# Altium PCB Mother_2.PcbDoc
Units mil, origin at the board's own origin, x right, y up, seen from the top; angles counter-clockwise.
Board outline 2752.23 x 2490.03 mil, 2 copper layers (Top Layer, Bottom Layer); 88 components, 82 nets, 343 pads, 18 vias.
Unrouted connection lines stored in the file: 67.
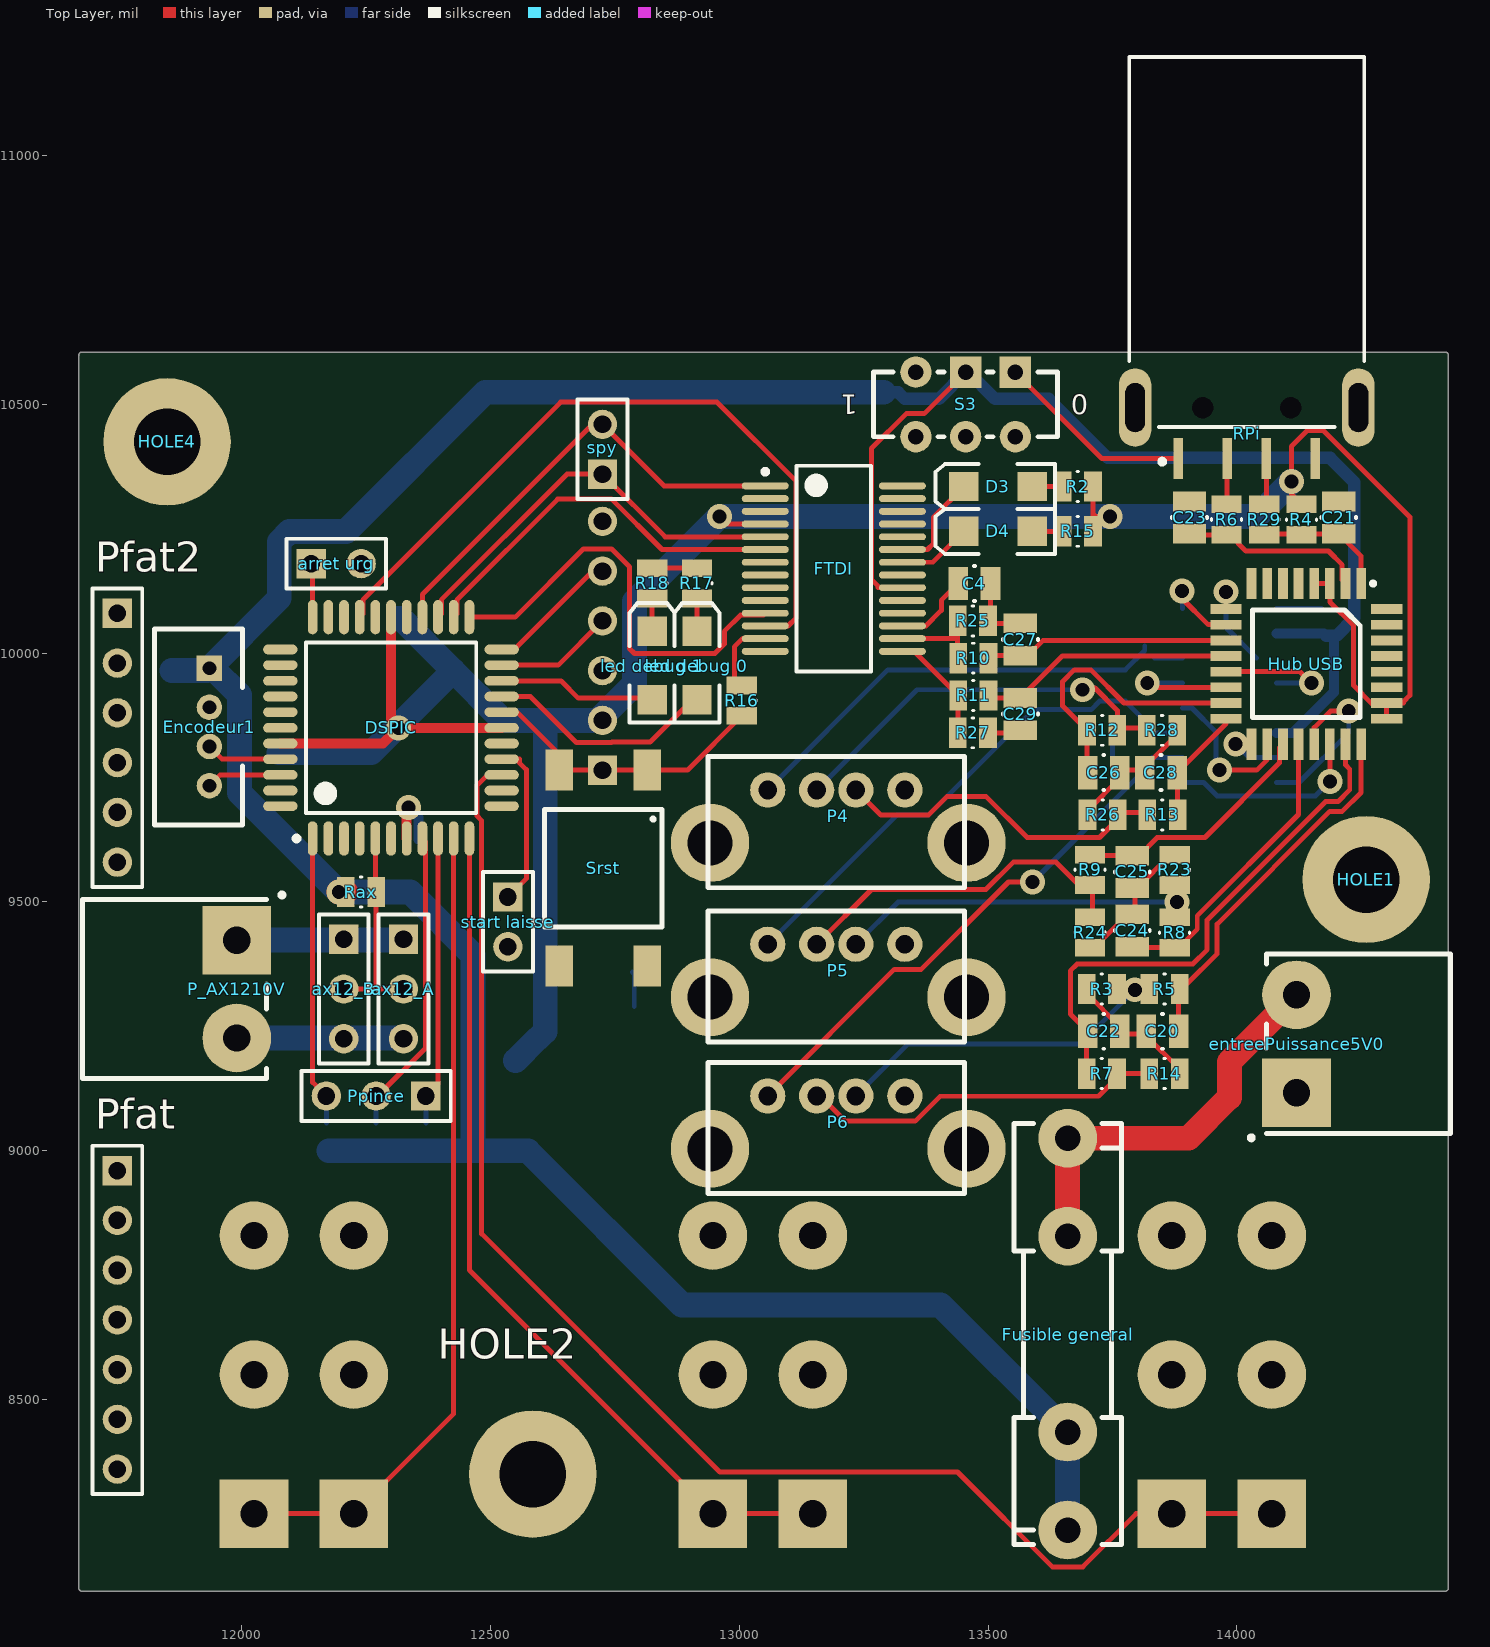
[diagram p0: Top Layer view]
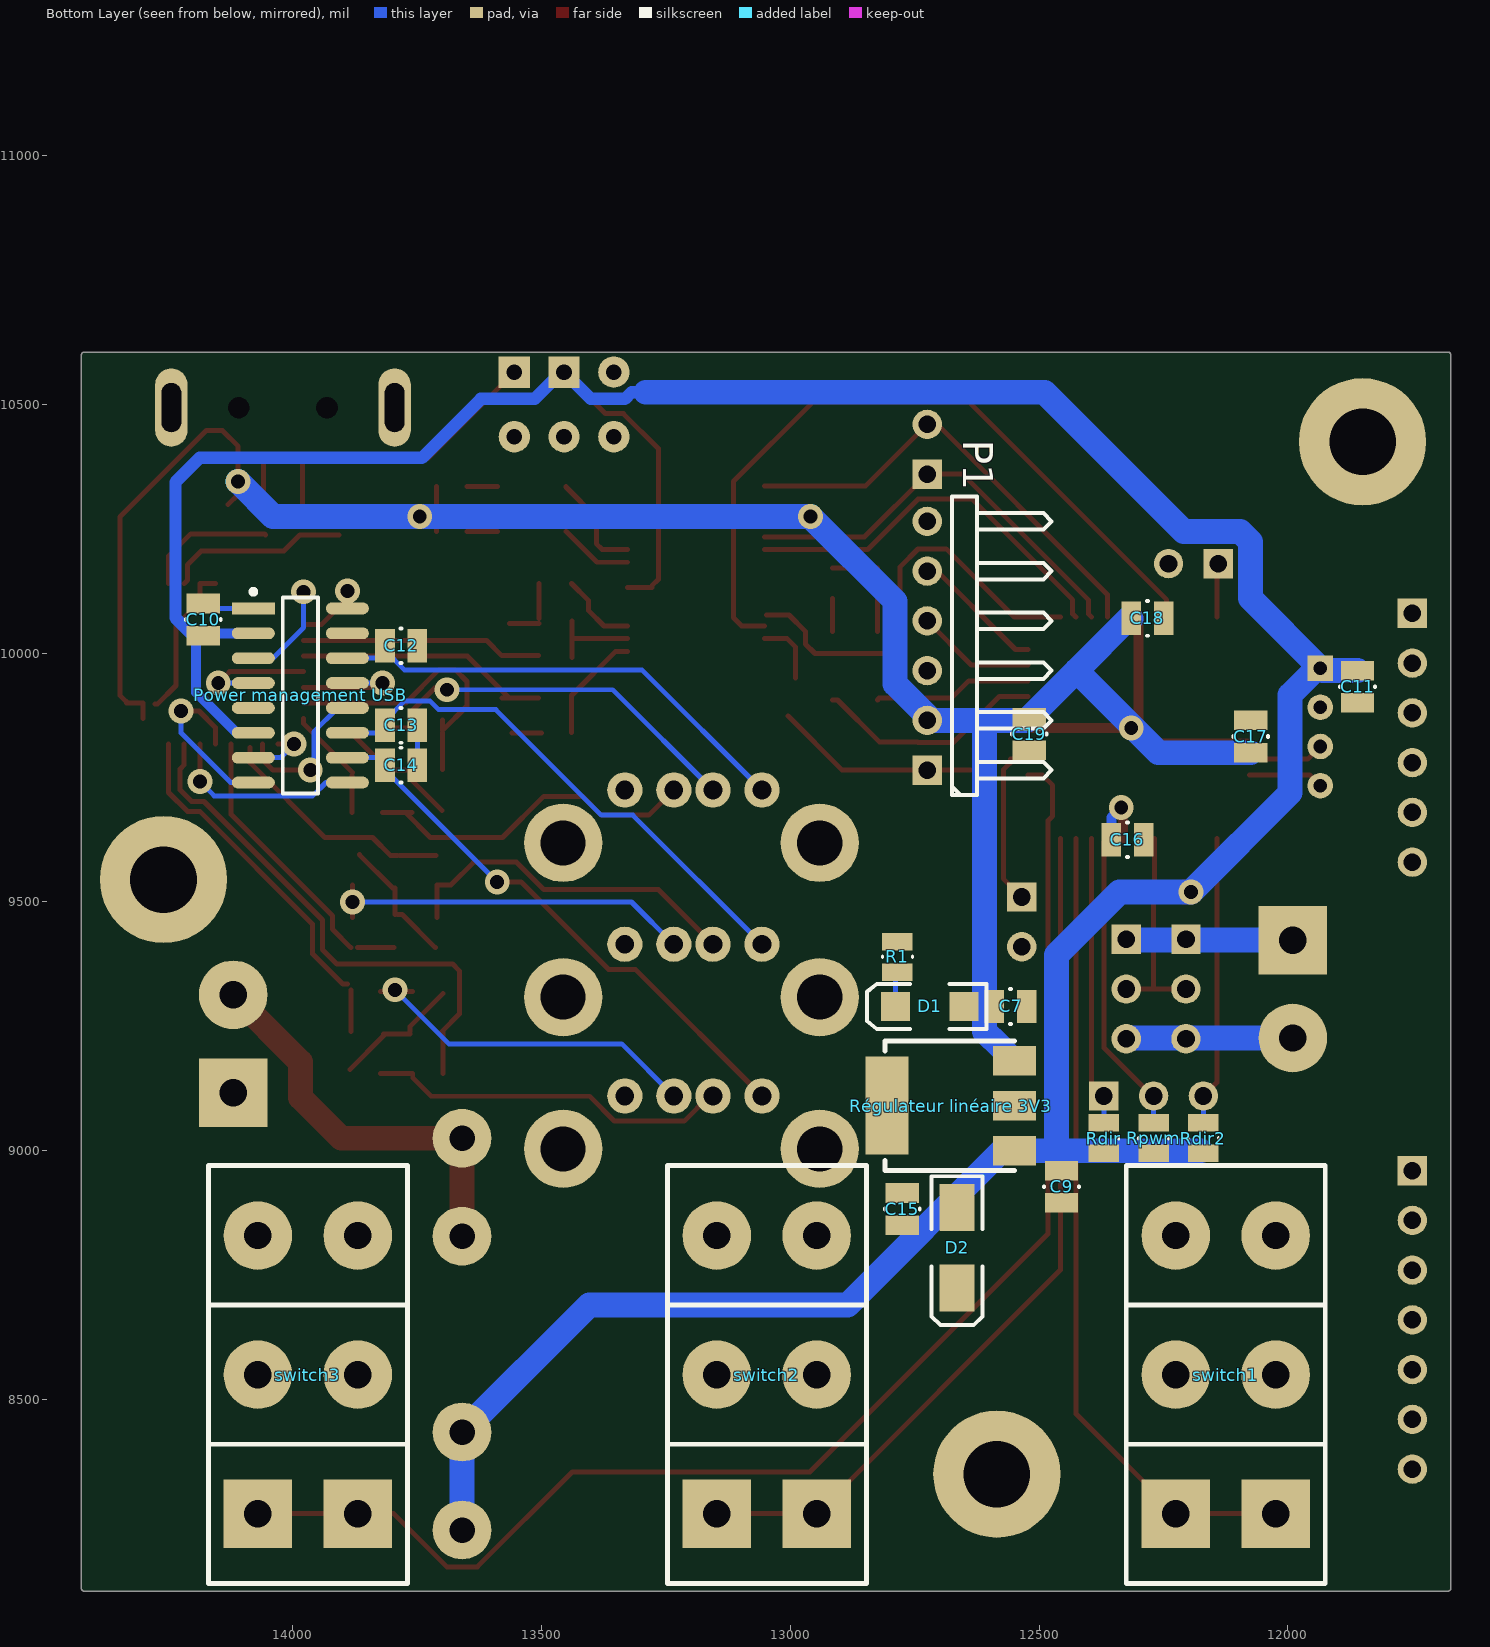
[diagram p1: Bottom Layer view, seen from below]

## Layer stack, top to bottom
Top Layer: signal copper 1.4
Dielectric: dielectric 12.6, FR-4, Dk 4.8
Bottom Layer: signal copper 1.4

## Board outline
11672.78,8120 11672.78,10597.8 cw(c11677.8,10597.8) 11672.9,10598.9 cw(c11677.8,10600) 11677.8,10605.01 14420,10605.01 cw(c14420,10600) 14425.01,10600 14425.01,8120 cw(c14420,8120) 14420,8114.98 11677.8,8114.98 cw(c11677.8,8120)

## Design rules (kind name [scope] priority, off if disabled: settings)
Clearance [All] p1: gap=10
Height [All] p1: minheight=0 maxheight=10000 prefheight=500
HoleSize [All] p1: absolutevalues=TRUE maxlimit=240 minlimit=1 maxpercent=80.000 minpercent=20.000
MinimumSolderMaskSliver [All] p1: minsoldermaskwidth=1
PolygonConnect [All] p1: connectstyle=Relief reliefconductorwidth=10 reliefentries=4 polygonreliefangle="90 Angle"
RoutingVias [All] p1: holewidth=28 width=50 viastyle="Through Hole" minholewidth=28 minwidth=50 maxholewidth=28 maxwidth=50
SilkToSilkClearance [All] p1: silktosilkclearance=1
SilkscreenOverComponentPads [All] p1: minsilkscreentomaskgap=1
SolderMaskExpansion [All] p1: expansion=4
Width [All] p1: maxlimit=100 minlimit=10 preferedwidth=10
23 further rules are at their usual default settings.

## Classes and differential pairs
component class mother1: C7 C9 C10 C12 C13 C14 C15 C20 C21 C22 C23 C24 C25 C26 C27 C28 C29 D1 D2 entreePuissance5V0 "Fusible general" HOLE1 HOLE2 HOLE4 "Hub USB" P4 P5 P6 "Power management USB" R1 R3 R4 R5 R6 R7 R8 R9 R10 R11 R12 R13 R14 R23 R24 R25 R26 R27 R28 R29 RPi "Régulateur linéaire 3V3" S3
component class U_mother1-pic: "arret urg" ax12_A ax12_B C4 C11 C16 C17 C18 C19 D3 D4 DSPIC Encodeur1 FTDI "led debug 0" "led debug 1" P1 P_AX1210V Pfat Pfat2 Ppince R2 R15 R16 R17 R18 Rax Rdir Rdir2 Rpwm spy Srst "start laisse" switch1 switch2 switch3

## Components (designator, comment, footprint, x,y, rotation, side; value= is the part's Value field where it differs from the comment)
"arret urg" "Header 2" HDR1X2 12140,10180 r0 top
ax12_A "Header 3" HDR1X3 12325,9425 r270 top
ax12_B "Header 3" HDR1X3 12205,9425 r270 top
C4 "CAP" C0805C 13440,10140 r0 top
C7 "CAP" C0805C 12525,9290 r0 bottom
C9 "CAP" C0805C 12455,8960 r270 bottom
C10 "CAP" C0805C 14180,10035 r90 bottom
C11 "CAP" C0805C 11860,9900 r90 bottom
C12 "CAP" C0805C 13750,10015 r0 bottom
C13 "CAP" C0805C 13750,9855 r0 bottom
C14 "CAP" C0805C 13750,9775 r0 bottom
C15 "CAP" C0805C 12775,8915 r270 bottom
C16 "CAP" C0805C 12290,9625 r0 bottom
C17 "CAP" C0805C 12075,9865 r270 bottom
C18 "CAP" C0805C 12250,10070 r0 bottom
C19 "CAP" C0805C 12520,9805 r90 bottom
C20 "CAP" C0805C 13883.03,9240 r180 top
C21 "CAP" C0805C 14205,10240 r90 top
C22 "CAP" C0805C 13700.04,9240 r0 top
C23 "CAP" C0805C 13905,10240 r90 top
C24 "CAP" C0805C 13790,9475 r270 top
C25 "CAP" C0805C 13790,9528.07 r90 top
C26 "CAP" C0805C 13765,9760 r180 top
C27 "CAP" C0805C 13565,9995 r90 top
C28 "CAP" C0805C 13815,9760 r0 top
C29 "CAP" C0805C 13565,9845 r90 top
D1 "LED2" LED1206G 12720,9290 r0 bottom
D2 "ZENER/5.6V" DSO-C2/X1.8 12665,8805 r270 bottom
D3 "LED" LED1206Y 13520,10335 r180 top
D4 "LED" LED1206Y 13520,10245 r180 top
DSPIC "DSPIC33FJ64MC804-I/PT" TQFP-PT44_N 12300,9850 r90 top
Encodeur1 "JST" B4B-PH-K-S 11935,9970 r270 top
entreePuissance5V0 "Bornier" "Bornier male coude 2 voies" 14120,9215 r90 top
FTDI "FT232RL" SSOP-28_M 13190,10170 r0 top
"Fusible general" "Fuse" "Fuse Holder 5x20mm" 13660,9025 r270 top
HOLE1 "Hole" SCREW 14260,9545 r0 top
HOLE2 "Hole" SCREW 12585,8350 r0 top
HOLE4 "Hole" SCREW 11850,10425 r0 top
"Hub USB" "TUSB2046BVF" TUSB2046BVF 14250,10140 r270 top
"led debug 0" "LED" LED1206R 12915,9975 r90 top
"led debug 1" "LED" LED1206R 12825,9975 r90 top
P1 "PICkit" HDR1X6H 12725,9765 r90 bottom
P4 "USB" "USB SM female vertical" 13195,9725 r0 top
P5 "USB" "USB SM female vertical" 13195,9415 r0 top
P6 "USB" "USB SM female vertical" 13195,9110 r0 top
P_AX1210V "Header 2" "Bornier male coude 2 voies" 11990,9325 r270 top
Pfat "Header 7" HDR1X7 11750,8960 r270 top
Pfat2 "Header 6" HDR1X6 11750,10080 r270 top
"Power management USB" "TPS2044" TPS2044 13985,9915 r180 bottom
Ppince "ControlleurPince" HDR1X3 12370,9110 r180 top
R1 "RES" C0805R 12785,9420 r270 bottom
R2 "RES" C0805R 13650,10335 r0 top
R3 "RES" C0805R 13698.07,9325 r0 top
R4 "RES" C0805R 14130,10238.03 r90 top
R5 "RES" C0805R 13885,9325 r180 top
R6 "RES" C0805R 13979.32,10299.06 r270 top
R7 "RES" C0805R 13698.07,9155 r0 top
R8 "RES" C0805R 13875,9408.07 r90 top
R9 "RES" C0805R 13705,9595 r270 top
R10 "RES" C0805R 13440,9990 r0 top
R11 "RES" C0805R 13440,9915 r0 top
R12 "RES" C0805R 13760,9845 r180 top
R13 "RES" C0805R 13820,9675 r0 top
R14 "RES" C0805R 13885,9155 r180 top
R15 "RES" C0805R 13650,10245 r0 top
R16 "RES" C0805R 13005,9935 r270 top
R17 "RES" C0805R 12915,10110 r90 top
R18 "RES" C0805R 12825,10110 r90 top
R23 "RES" C0805R 13875,9533.98 r90 top
R24 "RES" C0805R 13705,9469.09 r270 top
R25 "RES" C0805R 13500,10065 r180 top
R26 "RES" C0805R 13700,9675 r0 top
R27 "RES" C0805R 13500,9840 r180 top
R28 "RES" C0805R 13880,9845 r180 top
R29 "RES" C0805R 14055,10299.06 r270 top
Rax "RES" C0805R 12270,9520 r180 top
Rdir "RES" C0805R 12370,8995 r90 bottom
Rdir2 "RES" C0805R 12170,8995 r90 bottom
RPi "USB" "USB SM2.5 Male" 14020,10600 r90 top
Rpwm "RES" C0805R 12270,8995 r90 bottom
"Régulateur linéaire 3V3" "LM2937IMP-3.3" SOT223 12550,9000 r90 bottom
S3 "SW-DPDT/Reset" MCLSS22 13455,10565 r180 top
spy "Header 2" HDR1X2 12725,10360 r90 top
Srst "SPST-NO" SPST-NO 12815,9765 r180 top
"start laisse" "Header 2" HDR1X2 12535,9510 r270 top
switch1 "Switch slide 2 pos" "Switch sur cosses 5.08mm" 12125,8550 r180 bottom
switch2 "Switch slide 2 pos" "Switch sur cosses 5.08mm" 13047.5,8550 r180 bottom
switch3 "Switch slide 2 pos" "Switch sur cosses 5.08mm" 13970,8550 r180 bottom

## Footprints (in the part's own frame and the unit in brackets; to place one, negate y for a bottom-side part, rotate by r counter-clockwise, add the part's x,y. Pads: shape width x height; smd on the part's side, far side on the other; paste and mask are expansions set on the pad)
B4B-PH-K-S [mm] "JST Header 4 pins Straight"
  rect 1.3x1.3 hole 0.7: 1(0,0)
  round 1.3 hole 0.7: 2(2,0) 3(4,0) 4(6,0)
  silkscreen extent -2,-2.8 8,1.7, body extent -1.95,-2.8 7.95,1.7, height 6
"Bornier male coude 2 voies" [mm] "Bornier male coude 2 voies 12A. Pas 5mm (model : CTB9350/2A) -- 3D FAUSSE"
  rect 3.5x3.5 hole 1.4: 1(-2.5,0)
  round 3.5 hole 1.4: 2(2.5,0)
  silkscreen extent -4.9,-7.87 4.57,2.41, body extent -4.2,-7.93 4.2,1.27, height 7.25
C0805C [mm]
  rect 1x1.7 smd: 1(0,0) 2(1.65,0)
  silkscreen extent 0.8,-0.89 0.85,0.89, body extent -0.21,-0.61 1.79,0.64, height 0.78
C0805R [mm]
  rect 0.9x1.55 smd: 1(0,0) 2(1.55,0)
  silkscreen extent 0.73,-0.76 0.81,0.76, body extent -0.24,-0.62 1.76,0.63, height 0.78
DSO-C2/X1.8 [mm] "Diode; DO-214-AC/SMA; 2 C-Bend Leads; Body 5 x 2.7 mm, inc. leads (LxW)"
  rect 2.4x1.8 smd: A(2.05,0) K(-2.05,0)
  silkscreen extent -3.65,-1.3 3.95,1.3, body extent -2.74,-1.4 2.74,1.4, height 2.28
"Fuse Holder 5x20mm" [mm] "Schurter Fuse Holder 0751.0110"
  round 3 hole 1.3: 1(0,0) 1(5,0) 2(15,0) 2(20,0)
  silkscreen extent -0.75,-2.75 20.75,2.75, body extent -0.51,-3.1 20.58,3.1, height 9.86
HDR1X2 [mm] "Connector; Header; 2 Position"
  rect 1.5x1.5 hole 0.9: 1(0,0)
  round 1.5 hole 0.9: 2(2.54,0)
  silkscreen extent -1.27,-1.27 3.81,1.27
HDR1X3 [mm] "Connector; Header; 3 Position"
  rect 1.5x1.5 hole 0.9: 1(0,0)
  round 1.5 hole 0.9: 2(2.54,0) 3(5.08,0)
  silkscreen extent -1.27,-1.27 6.35,1.27
HDR1X6 [mm] "Connector; Header; 6 Position"
  rect 1.5x1.5 hole 0.9: 1(0,0)
  round 1.5 hole 0.9: 2(2.54,0) 3(5.08,0) 4(7.62,0) 5(10.16,0) 6(12.7,0)
  silkscreen extent -1.27,-1.27 13.97,1.27, body extent -1.17,-1.25 14.07,1.25, height 8.2
HDR1X6H [mm] "Connector; Header; 6 Position; Right Angle"
  rect 1.5x1.5 hole 0.9: 1(0,0)
  round 1.5 hole 0.9: 2(2.54,0) 3(5.08,0) 4(7.62,0) 5(10.16,0) 6(12.7,0)
  silkscreen extent -1.27,-6.35 13.97,-1.27, body extent -1.17,-5.85 13.87,1.25, height 5.42
HDR1X7 [mm] "Connector; Header; 7 Position"
  rect 1.5x1.5 hole 0.9: 1(0,0)
  round 1.5 hole 0.9: 2(2.54,0) 3(5.08,0) 4(7.62,0) 5(10.16,0) 6(12.7,0) 7(15.24,0)
  silkscreen extent -1.27,-1.27 16.51,1.27, body extent -1.17,-1.25 16.61,1.25, height 8.2
LED1206G [mm] "SMT LED; 2 Flat Leads; 3.2X1.6X1.1"
  rect 1.5x1.5 smd: 1(-1.75,0) 2(1.75,0)
  silkscreen extent -2.9,-1.15 3.2,1.15, body extent -1.6,-0.8 1.6,0.8, height 1.11
LED1206R [mm] "SMT LED; 2 Flat Leads; 3.2X1.6X1.1"
  rect 1.5x1.5 smd: 1(-1.75,0) 2(1.75,0)
  silkscreen extent -2.9,-1.15 3.2,1.15, body extent -1.6,-0.8 1.6,0.8, height 1.11
LED1206Y [mm] "SMT LED; 2 Flat Leads; 3.2X1.6X1.1"
  rect 1.5x1.5 smd: 1(-1.75,0) 2(1.75,0)
  silkscreen extent -2.9,-1.15 3.2,1.15, body extent -1.6,-0.8 1.6,0.8, height 1.11
MCLSS22 [mm] "Slide Switch DPDT"
  rect 1.6x1.6 hole 0.8: 1(0,0) 2(-2.54,0)
  round 1.6 hole 0.8: 3(2.54,0) 4(0,3.3) 5(-2.54,3.3) 6(2.54,3.3)
  silkscreen extent -4.7,0 4.7,3.3, body extent -4.7,-2 4.7,3.3, height 3.5
SCREW [mm] "Mounting Hole M3"
  round 6.5 hole 3.4: 1(0,0)
  body extent -2.89,-2.52 2.89,2.52, height 10
SOT223 [mm]
  rect 1.5x2.2 smd: 1(0,0) 2(2.3,0) 3(4.6,0)
  rect 5x2.2 smd: ""(2.3,6.5)
  silkscreen extent -1,0 5.6,6.6, body extent -0.95,-0.2 5.55,6.8, height 1.64
SPST-NO [mm] "Tactile Switch SPST-NO 6x6mm"
  rect 1.4x2.1 smd: 1(0,0) 2(4.5,0) 3(4.5,10) 4(0,10)
  silkscreen extent -0.75,2 5.25,8, body extent -0.75,0.93 5.25,9.08, height 5
SSOP-28_M [mm] "SOP, 28-Leads, Body 10.2x5.3mm, Pitch 0.65mm, IPC Low Density"
  oval 2.4x0.35 smd: 1(-3.5,4.225) 2(-3.5,3.575) 3(-3.5,2.925) 4(-3.5,2.275) 5(-3.5,1.625) 6(-3.5,0.975) 7(-3.5,0.325) 8(-3.5,-0.325) 9(-3.5,-0.975) 10(-3.5,-1.625) 11(-3.5,-2.275) 12(-3.5,-2.925) 13(-3.5,-3.575) 14(-3.5,-4.225) 15(3.5,-4.225) 16(3.5,-3.575) 17(3.5,-2.925) 18(3.5,-2.275) 19(3.5,-1.625) 20(3.5,-0.975) 21(3.5,-0.325) 22(3.5,0.325) 23(3.5,0.975) 24(3.5,1.625) 25(3.5,2.275) 26(3.5,2.925) 27(3.5,3.575) 28(3.5,4.225)
  silkscreen extent -3.62,-5.25 1.9,5.25, body extent -3.91,-5.1 3.91,5.1, height 1.98
"Switch sur cosses 5.08mm" [mm] "Crimp Faston CI 5.08mm model : AMP - 1217080-1"
  rect 3.5x3.5 hole 1.4: 1(-2.55,-7.1) 1(2.55,-7.1)
  round 3.5 hole 1.4: 2(-2.55,7.1) 2(2.55,7.1) 3(-2.55,0) 3(2.55,0)
  silkscreen extent -5.08,-10.67 5.08,10.67, body extent -11.5,-11 11.5,12, height 29.34
TPS2044 [mm] "Power distribution USB"
  rect 2.2x0.6 smd: 1(-2.4,4.445)
  oval 2.2x0.6 smd: 2(-2.4,3.175) 3(-2.4,1.905) 4(-2.4,0.635) 5(-2.4,-0.635) 6(-2.4,-1.905) 7(-2.4,-3.175) 8(-2.4,-4.445) 9(2.4,-4.445) 10(2.4,-3.175) 11(2.4,-1.905) 12(2.4,-0.635) 13(2.4,0.635) 14(2.4,1.905) 15(2.4,3.175) 16(2.4,4.445)
  silkscreen extent -2.53,-5 0.9,5.42, body extent -3,-5.1 3,5.1, height 1.7
TQFP-PT44_N [mm] "Thin QFP, 44-Leads, Body 10x10mm, Pitch 0.8mm, IPC Medium Density"
  oval 1.75x0.5 smd: 1(-5.65,4) 2(-5.65,3.2) 3(-5.65,2.4) 4(-5.65,1.6) 5(-5.65,0.8) 6(-5.65,0) 7(-5.65,-0.8) 8(-5.65,-1.6) 9(-5.65,-2.4) 10(-5.65,-3.2) 11(-5.65,-4) 23(5.65,-4) 24(5.65,-3.2) 25(5.65,-2.4) 26(5.65,-1.6) 27(5.65,-0.8) 28(5.65,0) 29(5.65,0.8) 30(5.65,1.6) 31(5.65,2.4) 32(5.65,3.2) 33(5.65,4)
  oval 0.5x1.75 smd: 12(-4,-5.65) 13(-3.2,-5.65) 14(-2.4,-5.65) 15(-1.6,-5.65) 16(-0.8,-5.65) 17(0,-5.65) 18(0.8,-5.65) 19(1.6,-5.65) 20(2.4,-5.65) 21(3.2,-5.65) 22(4,-5.65) 34(4,5.65) 35(3.2,5.65) 36(2.4,5.65) 37(1.6,5.65) 38(0.8,5.65) 39(0,5.65) 40(-0.8,5.65) 41(-1.6,5.65) 42(-2.4,5.65) 43(-3.2,5.65) 44(-4,5.65)
  silkscreen extent -5.77,-4.35 4.35,4.95, body extent -6,-6 6,6, height 1.05
TUSB2046BVF [mil] "TI 4-Port USB Hub"
  rect 63x19.7 smd: 1(0,0) 2(0,-31.5) 3(0,-63) 4(0,-94.5) 5(0,-125.9) 6(0,-157.4) 7(0,-188.9) 8(0,-220.4) 17(322.8,-220.4) 18(322.8,-188.9) 19(322.8,-157.4) 20(322.8,-125.9) 21(322.8,-94.5) 22(322.8,-63) 23(322.8,-31.5) 24(322.8,0)
  rect 19.7x63 smd: 9(51.2,-271.6) 10(82.7,-271.6) 11(114.2,-271.6) 12(145.7,-271.6) 13(177.1,-271.6) 14(208.6,-271.6) 15(240.1,-271.6) 16(271.6,-271.6) 25(271.6,51.2) 26(240.1,51.2) 27(208.6,51.2) 28(177.1,51.2) 29(145.7,51.2) 30(114.2,51.2) 31(82.7,51.2) 32(51.2,51.2)
  silkscreen extent -4,-218 270,28, body extent -16,-287 339,67, height 59
"USB SM2.5 Male" [mm] "USB/SM2.5-4H4; Male USB Connector; USB1.1, Type A, SM; 4 Position; Right Angle"
  rect 2.1x0.5 smd: 1(-5.3,3.5) 2(-5.3,1) 3(-5.3,-1) 4(-5.3,-3.5)
  oval 4x1.65 hole 1 slot 2.5 at 0 deg: 5(-2.7,-5.7) 6(-2.7,5.7)
  round 0.8 hole 1.1 unplated: MH1(-2.7,-2.25) MH2(-2.7,2.25)
  silkscreen extent -5.58,-6 15.2,6, body extent -3.5,-6 14.83,6, height 4.5
"USB SM female vertical" [mm] "USB SM female vertical"
  round 1.8 hole 0.95: 1(-3.5,0) 2(-1,0) 3(1,0) 4(3.5,0)
  round 4 hole 2.3: 5(6.65,-2.7) 6(-6.45,-2.7)
  silkscreen extent -6.55,-4.99 6.55,1.7, body extent -7.99,-4.99 7.99,2.65, height 13.75

## Part data
"arret urg" P_AX1210V spy "start laisse": "Header, 2-Pin"
ax12_A ax12_B: "Header, 3-Pin"
C4 C7 C9 C10 C11 C12 C13 C14 C15 C16 C17 C18 C19 C20 C21 C22 C23 C24 C25 C26 C27 C28 C29: "Capacitor"
D1: "Typical RED, GREEN, YELLOW, AMBER GaAs LED"
D2: library part ZENER, "ZENER"
D3 D4 "led debug 0" "led debug 1": library part LED2, "Typical RED, GREEN, YELLOW, AMBER GaAs LED"
DSPIC: "High-Performance 16-bit Digital Signal Controller, 64 KB Flash, 16 KB RAM, 44-Pin TQFP, Industrial Temperature"
Encodeur1: library part "Header 4", "Header, 4-Pin"
entreePuissance5V0: library part "Header 2", "Header, 2-Pin"
FTDI: "USB UART Asynchronous Serial Data Transfer Chip, SSOP-28, Tube"
"Fusible general": library part FUSE
HOLE1 HOLE2 HOLE4: "Mounting Hole for screws"
"Hub USB": "TI 4-Port USB Hub"
P1: library part "Header ICSP", "Header, 6-Pin, Right Angle"
P4 P5 P6 RPi: library part "USB Con", "USB Connector"
Pfat: "Header, 7-Pin"
Pfat2: "Header, 6-Pin"
"Power management USB": "Power distribution USB"
Ppince: library part "Header 3", "Header, 3-Pin"
R1 R2 R3 R4 R5 R6 R7 R8 R9 R10 R11 R12 R13 R14 R15 R16 R17 R18 R23 R24 R25 R26 R27 R28 R29 Rax Rdir Rdir2 Rpwm: "Resistor"
"Régulateur linéaire 3V3": "500 mA Low Dropout Regulator"
S3: library part SW-DPDT, "Double-Pole, Double-Throw Switch, ref MCLSS22"
Srst: "Tactile Switch 7.3mm, SMD"
switch1 switch2 switch3: library part "Switch slide On/Off", "Switch slide 2 positions"

## Via types
v1: diameter 50, hole 28, Top Layer to Bottom Layer, 18 vias

## Nets (pads, with @x,y where several pads share a name; then routed paths per layer and width w, separated by ;. In a path a pad name is that pad's centre, name@x,y a point inside that pad or via, vN(x,y) a via of type N, cw(c..) or ccw(c..) an arc to the next point about the centre after c; other vN are vias at no path point)
+3V3: "Hub USB.3" "Hub USB.4" "Hub USB.25" "Hub USB.26" "Régulateur linéaire 3V3.3" C7.2 C17.2 C18.2 C19.2 D1.1 DSPIC.17 DSPIC.28 DSPIC.40 FTDI.4 P1.2 R2.2 R4.2 R15.2 | length 5427.1
  Top Layer w10: v1@12300,9865 v1(12315,9850) ; v1(12960,10275) 12975.43,10259.57 FTDI.4 ; R15.2 13711.02,10280 ; R2.2 13711.02,10280 ; v1(13745,10275) 13716.02,10275 13711.02,10280 ; R4.2 14110,10319.06 v1(14110,10344.96) 14110,10415.94 14141.74,10447.68 14173.85,10447.68 14347.7,10273.83 14347.7,9915.34 14334.9,9902.54 14334.9,9899.9 14301.2,9899.9 14301.2,9868.4 ; 14155.5,10140 14187,10140 14187,10103 14235,10055 14235,9935 14272.52,9897.48 14277.48,9897.48
  Top Layer w20: DSPIC.40 12283.5,9818.5 v1(12315,9850) DSPIC.17 ; v1@12300,9865 DSPIC.28
  Bottom Layer w50: C17.2 12260.08,9800.04 12425,9964.96 ; C18.2 12319.96,10070 12425,9964.96 ; 12550,9181.1 12593.9,9225 12595,9225 12610,9240 12610,9865 ; v1(14110,10344.96) 14040.04,10275 v1(13745,10275) v1(12960,10275) 12789.53,10104.53 12789.53,9938.27 12725,9873.74 P1.2 12610,9865 ; 12425,9964.96 C19.2 12524.96,9865 12610,9865
+5V0: "Fusible general.2" "Power management USB.2" "Power management USB.6" "Régulateur linéaire 3V3.1" C9.1 C10.1 C11.2 C15.2 D2.K Encodeur1.1 FTDI.20 Rax.2 Rdir2.1 Rdir.1 Rpwm.1 S3.1 | length 7279.3
  Top Layer w10: FTDI.20 13278.39,10131.61 13278.39,10135.3 13265.55,10148.14 13265.55,10411.39 13335.74,10481.57 13371.57,10481.57 S3.1
  Top Layer w50: v1(12195,9520) Rax.2
  Bottom Layer w20: 14079.49,9840 14113.64,9840 14195,9921.36 C10.1@14195,10035 ; 14079.49,10040 C10.1@14175,10040
  Bottom Layer w25: 13290.47,10524.53 13319.11,10524.53 13332.63,10511 13401,10511 S3.1 13460.19,10565 13514.18,10511 13622.07,10511 13740.61,10392.46 14187.54,10392.46 14235.96,10344.04 14235.96,10070.96 C10.1@14200.01,10035 ; C10.1 C10.1@14195,10035
  Bottom Layer w50: C11.2 Encodeur1.1@11929.96,9964.96 ; Rdir2.1@12175,9000 12465,9000 ; 13290.47,10524.53 12489.53,10524.53 12209.53,10244.53 12095.98,10244.53 12075.47,10224.02 12075.47,10110.47 Encodeur1.1 11941.95,9970 11995.59,9916.36 11995.59,9719.41 v1(12195,9520) 12338.55,9520 12465,9393.55 12465,9000 ; 13660,8237.6 13660,8434.45 13404.45,8690 12885,8690 12575,9000 12550,9000 12465,9000
+10V0: ax12_A.1 ax12_B.1 P_AX1210V.1 | length 335.7
  Bottom Layer w20: ax12_A.1@12323.43,9423.43 ax12_A.1
  Bottom Layer w50: P_AX1210V.1 ax12_A.1@12323.43,9423.43
A1: DSPIC.41 Encodeur1.3 | length 153.1
  Top Layer w10: Encodeur1.3 11960.51,9787.01 DSPIC.41
"ARRET URG": "arret urg.1" DSPIC.33 | length 108.6
  Top Layer w10: 12140,10180 12142.52,10177.48 DSPIC.33
B1: DSPIC.42 Encodeur1.4 | length 151.6
  Top Layer w10: Encodeur1.4 11956.73,9755.51 DSPIC.42
CLK12: DSPIC.30 FTDI.12 | length 1482
  Top Layer w10: DSPIC.30 12243.66,10079.09 12243.66,10107.34 12640.85,10504.53 12955.33,10504.53 13114.45,10345.41 13114.45,10071.37 13097.93,10054.84 FTDI.12
D+: FTDI.15 R11.1 R27.2 | length 222.9
  Top Layer w10: FTDI.15 13351.34,10003.66 R11.1 R27.2@13440,9841.02
D-: FTDI.16 R10.1 R25.2 | length 184.4
  Top Layer w10: FTDI.16 13438.23,10029.25 ; R10.1@13438.98,9991.02 R25.2
"DATA AX12": ax12_A.2 ax12_B.2 DSPIC.5 Rax.1 | length 421.1
  Top Layer w10: ax12_B.2 12270,9325 ; Rax.1@12268.5,9521.5 DSPIC.5 ; Rax.1 12270,9325 ; ax12_A.2 12270,9325
DIR1: DSPIC.9 Ppince.1 Rdir.2 | length 581.7
  Top Layer w10: Ppince.1 12394.49,9134.49 DSPIC.9
  Bottom Layer w10: Rdir.2 Ppince.1
DIR2: DSPIC.1 Ppince.3 Rdir2.2 | length 582.9
  Top Layer w10: DSPIC.1 12142.52,9137.48 Ppince.3
  Bottom Layer w10: Rdir2.2 Ppince.3
DM0: R6.1 RPi.2 | length 91
  Top Layer w10: R6.1@13980.63,10300.36 RPi.2
DM2: P4.2 R12.1 R28.2 | length 801.9
  Top Layer w10: v1(13690,9926.54) 13693.46,9930 13715,9930 13760,9885 13760,9850 R28.2@13818.98,9850
  Bottom Layer w10: P4.2 13357.17,9926.54 v1(13690,9926.54)
DM3: P5.2 R9.2 R24.1 | length 706.7
  Top Layer w10: P5.2 13265.59,9524.96 13495.64,9524.96 13550.68,9580 13636.57,9580 13682.59,9533.98 R9.2 13710,9533.98 R24.1@13710,9469.09
DM4: P6.2 R7.2 R14.2 | length 733.7
  Top Layer w10: P6.2 13163.05,9110 13213.48,9059.57 13353.69,9059.57 13403.61,9109.49 13722,9109.49 13759.09,9146.58 R7.2 R14.2
DP0: R29.1 RPi.3 | length 87.9
  Top Layer w10: R29.1@14059.37,10303.43 RPi.3
DP2: P4.3 R13.1 R26.2 | length 690.9
  Top Layer w10: P4.3 13284.8,9674.57 13380.11,9674.57 13417.98,9712.44 13495.64,9712.44 13578.59,9629.49 13723.93,9629.49 R26.2@13774.44,9680 ; R26.2@13761.02,9680 R26.2@13774.44,9680 ; R13.1@13820,9680 R26.2@13774.44,9680
DP3: P5.3 R8.2 R23.1 | length 750.7
  Top Layer w10: R8.2@13880,9469.09 v1(13880,9500) R23.1@13880,9533.98
  Bottom Layer w10: P5.3 13319.37,9500 v1(13880,9500) v1@13880,9495
DP4: P6.3 R3.2 R5.2 | length 718.8
  Top Layer w10: R3.2@13759.09,9320 v1@13791.54,9320 ; v1(13795,9323.46) v1@13791.54,9320 ; R5.2@13823.98,9320 v1@13791.54,9320
  Bottom Layer w10: P6.3 13339.33,9214.96 13686.5,9214.96 v1(13795,9323.46)
FLUSH: DSPIC.24 FTDI.6 | length 782.9
  Top Layer w10: DSPIC.24 12432.64,10079.09 12432.64,10107.34 12634.83,10309.53 12654.83,10309.53 12743.44,10309.53 12844.59,10208.39 FTDI.6
GND: "arret urg.2" "Hub USB.6" "Hub USB.7" "Hub USB.8" "Hub USB.28" "Hub USB.31" "Power management USB.1" "Power management USB.5" "Régulateur linéaire 3V3.2" "start laisse.2" ax12_A.3 ax12_B.3 C4.2 C7.1 C9.2 C10.2 C11.1 C12.1 C13.1 C14.1 C15.1 C16.1 C17.1 C18.1 C19.1 C20.2 C21.2 C22.2 C23.2 C24.1 C25.1 C26.1 C27.2 C28.1 C29.1 D2.A DSPIC.6 DSPIC.16 DSPIC.29 DSPIC.39 Encodeur1.2 entreePuissance5V0.1 FTDI.7 FTDI.18 FTDI.21 FTDI.25 FTDI.26 P1.3 P4.4 P5.4 P6.4 P_AX1210V.2 R1.1 R3.1 R14.1 R17.2 R18.2 R23.2 R24.2 R25.1 R26.1 R27.1 R28.1 RPi.4 Srst.3 Srst.4 switch1.3 switch2.3 switch3.3 | length 1550.6
  Top Layer w10: R18.2 R17.2 ; R27.1 C29.1@13560,9840 ; R25.1@13504.96,10069.96 C4.2 ; R25.1@13505.04,10059.96 C27.2 ; R3.1@13698.07,9316.33 13765,9249.4 C22.2 ; R26.1@13700,9683.42 13765,9748.42 C26.1 ; R24.2@13713.67,9408.07 13780.6,9475 C24.1 ; C22.2@13765,9235 13818.07,9235 13818.07,9230.6 R14.1@13885,9163.67 ; C26.1@13765,9765 13815,9765 13815,9771.58 R28.1@13880,9836.58 ; C24.1@13795,9475 13795,9528.07 13799.4,9528.07 R23.2@13866.33,9595
  Bottom Layer w10: C14.1 C13.1 ; 14079.49,10090 C10.2@14170.04,10090
  Bottom Layer w20: ax12_A.3@12323.43,9226.57 ax12_A.3
  Bottom Layer w50: P_AX1210V.2 ax12_A.3@12323.43,9226.57
GPIO: FTDI.13 R16.1 | length 132.4
  Top Layer w10: R16.1@12989.96,9950.04 12989.96,10012.73 13007.23,10030 13051.46,10030 FTDI.13
MCLR: DSPIC.18 P1.1 R16.2 Srst.1 Srst.2 | length 551.5
  Top Layer w10: DSPIC.18 12553.5,9881.5 Srst.2@12630,9805 ; Srst.2 P1.1 Srst.1 12896.02,9765 R16.2
NetC4_1: C4.1 FTDI.17 | length 159.2
  Top Layer w10: FTDI.17 13374.84,10054.84 13406.26,10086.26 13406.26,10106.26 C4.1
NetC16_2: C16.2 DSPIC.7 | length 137.2
  Top Layer w20: DSPIC.7 12331.5,9671.5 12335,9675 v1(12335,9690)
  Bottom Layer w20: v1(12335,9690) 12354.96,9670.04 C16.2
NetC20_1: "Hub USB.24" C20.1 R5.1 | length 734.6
  Top Layer w10: C20.1 R5.1@13883.03,9323.03 ; R5.1@13890,9335 13899.65,9335 13960.51,9395.86 13960.51,9455.51 14187,9682 14211.85,9682 14250,9720.15 14250,9817.2
NetC21_1: "Hub USB.1" C21.1 R4.1 R29.2 | length 269.5
  Top Layer w10: R29.2 14056.97,10240 C21.1 14250,10195 14250,10140
NetC22_1: "Hub USB.23" C22.1 R7.1 | length 1061.7
  Top Layer w10: R7.1 C22.1@13698.07,9238.03 ; C22.1 13665.35,9274.69 13665.35,9361.73 13678.98,9375.35 13911.73,9375.35 13940.51,9404.14 13940.51,9463.8 14178.72,9702 14203.57,9702 14227,9725.43 14227,9767.07 14218.5,9775.57 14218.5,9817.2
NetC23_1: "Hub USB.2" C23.1 R6.2 | length 370.3
  Top Layer w10: C23.1@13906.97,10238.03 R6.2 13985.56,10238.03 14018.27,10205.31 14184.25,10205.31 14211.85,10177.71 14211.85,10146.65 14218.5,10140
NetC24_2: "Hub USB.20" C24.2 R8.1 | length 581.9
  Top Layer w10: C24.2@13796.97,9408.07 R8.1@13870,9408.07 ; R8.1@13883.42,9408.07 13920.51,9445.16 13920.51,9472.08 14124.1,9675.67 14124.1,9817.2
NetC25_2: "Hub USB.19" C25.2 R9.1 | length 477.3
  Top Layer w10: R9.1@13711.97,9593.03 C25.2@13785,9593.03 ; C25.2 13803.59,9593.03 13840.05,9629.49 13935.95,9629.49 14085.95,9779.49 14085.95,9810.55
NetC26_2: "Hub USB.15" C26.2 R12.2 | length 579.1
  Top Layer w10: C26.2@13698.98,9766.06 R12.2@13698.98,9840 ; R12.2@13698.98,9866.02 R12.2 13650,9893.98 13650,9943.1 13673.43,9966.54 13706.75,9966.54 13773.38,9899.9 13978.4,9899.9
NetC27_1: "Hub USB.11" C27.1 R10.2 | length 485.1
  Top Layer w10: R10.2@13506.02,9995 C27.1 13580,9995 13610.8,10025.8 13978.4,10025.8
NetC28_2: "Hub USB.16" C28.2 R13.2 | length 223.1
  Top Layer w10: C28.2 13978.4,9858.44 13978.4,9868.4 ; R13.2@13881.02,9680 C28.2@13881.02,9753.94
NetC29_2: "Hub USB.12" C29.2 R11.2 | length 522.2
  Top Layer w10: R11.2@13506.06,9909.96 C29.2 ; C29.2@13579.96,9909.96 C29.2 ; 13978.4,9994.3 13649.34,9994.3 C29.2
NetD1_2: D1.2 R1.2 | length 70.6
  Bottom Layer w10: R1.2 12788.9,9355.08 D1.2
NetD3_1: D3.1 R2.1 | length 61.1
  Top Layer w10: D3.1 R2.1
NetD4_1: D4.1 R15.1 | length 61.1
  Top Layer w10: D4.1 R15.1
NetDSPIC_2: DSPIC.2 Pfat.3
NetDSPIC_3: DSPIC.3 Pfat.2
NetDSPIC_4: DSPIC.4 Pfat.1
NetDSPIC_12: DSPIC.12 Pfat2.6
NetDSPIC_13: DSPIC.13 Pfat2.3
NetDSPIC_19: "led debug 0.1" DSPIC.19 | length 466.4
  Top Layer w10: DSPIC.19 12579.95,9912.99 12672.47,9820.47 12743.44,9820.47 12744.31,9821.34 12820.5,9821.34 12905.27,9906.1 12915,9906.1
NetDSPIC_20: "led debug 1.1" DSPIC.20 | length 318.5
  Top Layer w10: DSPIC.20 12641.52,9944.49 12676.48,9909.53 12821.57,9909.53 12825,9906.1
NetDSPIC_27: DSPIC.27 Pfat.7
NetDSPIC_31: DSPIC.31 Pfat2.1
NetDSPIC_32: DSPIC.32 Pfat2.4
NetDSPIC_34: DSPIC.34 Pfat2.2
NetDSPIC_35: DSPIC.35 Pfat2.5
NetDSPIC_36: DSPIC.36 Pfat.6
NetDSPIC_37: DSPIC.37 Pfat.5
NetDSPIC_38: DSPIC.38 Pfat.4
NetentreePuissance5V0_2: "Fusible general.1" entreePuissance5V0.2 | length 818
  Top Layer w50: 13660,8828.15 13660,9025 13902.76,9025 13985,9107.24 13985,9178.43 entreePuissance5V0.2
"Netled debug 0_2": "led debug 0.2" R17.1 | length 66.1
  Top Layer w10: 12915,10043.9 R17.1
"Netled debug 1_2": "led debug 1.2" R18.1 | length 66.1
  Top Layer w10: 12825,10043.9 R18.1
NetRPi_1: RPi.1 S3.2 | length 399.1
  Top Layer w10: S3.2 13728.66,10391.34 RPi.1
OUT1: "Power management USB.15"
OUT2: "Power management USB.14" C12.2 P4.1 | length 938.9
  Bottom Layer w10: P4.1 13298.74,9966.54 13775.9,9966.54 13814.96,10005.6 C12.2 ; 13834.96,9990 13890.51,9990
OUT3: "Power management USB.11" C13.2 P5.1 | length 1046.2
  Bottom Layer w10: P5.1 13316.77,9674.57 13380.11,9674.57 13592.08,9886.54 13707.17,9886.54 13724.1,9903.46 13775.9,9903.46 13814.96,9864.4 C13.2 ; C13.2@13829.96,9840 13890.51,9840
OUT4: "Power management USB.10" C14.2 P6.1 | length 1099.3
  Top Layer w10: P6.1 13311.77,9364.57 13365.6,9364.57 13541.04,9540 v1(13589.36,9540)
  Bottom Layer w10: v1(13589.36,9540) 13814.96,9765.6 C14.2 ; C14.2@13829.96,9790 13890.51,9790
OVRCUR1: "Hub USB.10" "Power management USB.16" | length 160.4
  Top Layer w10: v1(13890,10125) 13890,10110 13942.7,10057.3 13978.4,10057.3
  Bottom Layer w10: v1(13890,10125) 13890.51,10124.49 13890.51,10090
OVRCUR2: "Hub USB.14" "Power management USB.13" | length 232.5
  Top Layer w10: v1(13820,9940) 13828.6,9931.4 13978.4,9931.4
  Bottom Layer w10: v1(13820,9940) 13890.51,9940
OVRCUR3: "Hub USB.18" "Power management USB.12" | length 303.1
  Top Layer w10: v1(13965,9765) 14039.96,9765 14061.1,9786.14 14061.1,9817.2
  Bottom Layer w10: 13890.51,9890 13909.92,9890 13957.8,9842.12 13957.8,9772.2 v1(13965,9765)
OVRCUR4: "Hub USB.22" "Power management USB.9" | length 394.7
  Top Layer w10: v1(14187,9742) 14187,9817.2
  Bottom Layer w10: 13890.51,9740 13933.43,9740 13960.24,9713.19 14158.19,9713.19 v1(14187,9742)
PGEC: DSPIC.22 P1.5 | length 276.1
  Top Layer w10: DSPIC.22 12547.48,10007.48 P1.5@12725,10185
PGED: DSPIC.21 P1.4 | length 239.4
  Top Layer w10: DSPIC.21 12615.98,9975.98 12635.98,9975.98 P1.4
PWMH: DSPIC.8 Ppince.2 Rpwm.2 | length 617.2
  Top Layer w10: Ppince.2 12272.97,9110 12369.53,9206.56 12369.53,9621.02 DSPIC.8
  Bottom Layer w10: Rpwm.2 Ppince.2
PWRON1: "Hub USB.9" "Power management USB.3" | length 193.5
  Top Layer w10: 13978.4,10088.8 v1(13978.4,10123.4)
  Bottom Layer w10: v1(13978.4,10123.4) 13978.4,10051.6 14040,9990
PWRON2: "Hub USB.13" "Power management USB.4" | length 251.6
  Top Layer w10: 13978.4,9962.9 14127.1,9962.9 v1(14150,9940)
  Bottom Layer w10: 14079.49,9940 v1(14150,9940)
PWRON3: "Hub USB.17" "Power management USB.7" | length 124.8
  Top Layer w10: v1(13997.8,9817.2) 14029.6,9817.2
  Bottom Layer w10: v1(13997.8,9817.2) 14025,9790 14079.49,9790
PWRON4: "Hub USB.21" "Power management USB.8" | length 362.9
  Top Layer w10: 14155.5,9817.2 14155.5,9850.5 14188.7,9883.7 14234.7,9883.7 v1@14226,9875
  Bottom Layer w10: 14079.49,9740 14125,9740 14225,9840 14225,9876 v1@14226,9875
  other v1: 14225,9883.7
RTS: DSPIC.23 FTDI.11 | length 877.9
  Top Layer w10: DSPIC.23 12549.47,10072.44 12686.79,10209.76 ; 12687.03,10209.53 12743.44,10209.53 12779.49,10173.48 12779.49,10009.14 12789.26,9999.37 12950.74,9999.37 12969.96,10018.59 12969.96,10043.91 13002.78,10076.73 FTDI.11@13048.5,10076.73
RX: DSPIC.26 FTDI.1 spy.2 | length 935.9
  Top Layer w10: DSPIC.26 12362.99,10117.99 spy.2@12725,10480 ; spy.2 12848.66,10336.34 FTDI.1
RXLED: D3.2 FTDI.23 | length 207.3
  Top Layer w10: FTDI.23 13378.39,10208.39 13390.04,10220.04 13390.04,10272.99 13451.1,10334.06 D3.2
"START LAISSE": "start laisse.1" DSPIC.15 | length 333.6
  Top Layer w10: DSPIC.15 12557.99,9787.01 12557.99,9779.7 12571.89,9765.8 12571.89,9546.89 12535,9510
SWITCH1: DSPIC.10 switch1.1 | length 1641
  Top Layer w10: switch1.1@12024.61,8270.47 12225.39,8270.47 12425.98,8471.06 DSPIC.10
SWITCH2: DSPIC.11 switch2.1 | length 1760.7
  Top Layer w10: DSPIC.11 12457.48,8760.1 12947.11,8270.47 switch2.1@13147.89,8270.47
SWITCH3: DSPIC.14 switch3.1 | length 2873
  Top Layer w10: DSPIC.14 12521.93,9755 12493.69,9755 12472.99,9734.31 12472.99,9672.9 12482.32,9663.57 12482.32,8833.08 12961.03,8354.37 13438.5,8354.37 13629.33,8163.54 13690.67,8163.54 13797.6,8270.47 13869.61,8270.47 switch3.1@14070.39,8270.47
TX: DSPIC.25 FTDI.5 spy.1 | length 845.6
  Top Layer w10: DSPIC.25 12401.14,10079.09 12401.14,10107.34 12653.8,10360 12673.8,10360 spy.1 12851.02,10233.98 FTDI.5
TXLED: D4.2 FTDI.22 | length 149.5
  Top Layer w10: FTDI.22 13388.9,10182.8 D4.2 D4.2@13450.64,10245
pads on no net: "Hub USB.5" "Hub USB.27" "Hub USB.29" "Hub USB.30" "Hub USB.32" "Régulateur linéaire 3V3." DSPIC.43 DSPIC.44 FTDI.2 FTDI.3 FTDI.8 FTDI.9 FTDI.10 FTDI.14 FTDI.19 FTDI.24 FTDI.27 FTDI.28 HOLE1.1 HOLE2.1 HOLE4.1 P1.6 P4.5 P4.6 P5.5 P5.6 P6.5 P6.6 RPi.5 RPi.6 RPi.MH1 RPi.MH2 S3.3 S3.4 S3.5 S3.6 switch1.2 switch2.2 switch3.2

## Silkscreen, mask and mechanical layers (free items; w line width, h text height)
Mechanical 1:
  lines w10: 11677.8,10597.8 11677.8,8120 14420,8120 14420,10600 11677.8,10600

## Text inside footprints (layer, text, board x,y; h text height)
RPi: Mechanical 1 "PCB Edge" at 14223.65,10618.6 h9.84 r180
S3: Top Overlay "1" at 13238.46,10519.72 h39.37 r180; Top Overlay "0" at 13701.06,10519.72 h39.37 r180